# Altium PCB YAW.PcbDoc (part 3 of 3)
Units mil, origin at the board's own origin, x right, y up, seen from the top; angles counter-clockwise.
Board outline 2374.09 x 1897.47 mil, 6 copper layers (Top Layer, Layer 1, Layer 2, Layer 3, Layer 4, Bottom Layer), stack 32.112 mil thick; 77 components, 82 nets, 341 pads, 389 vias.
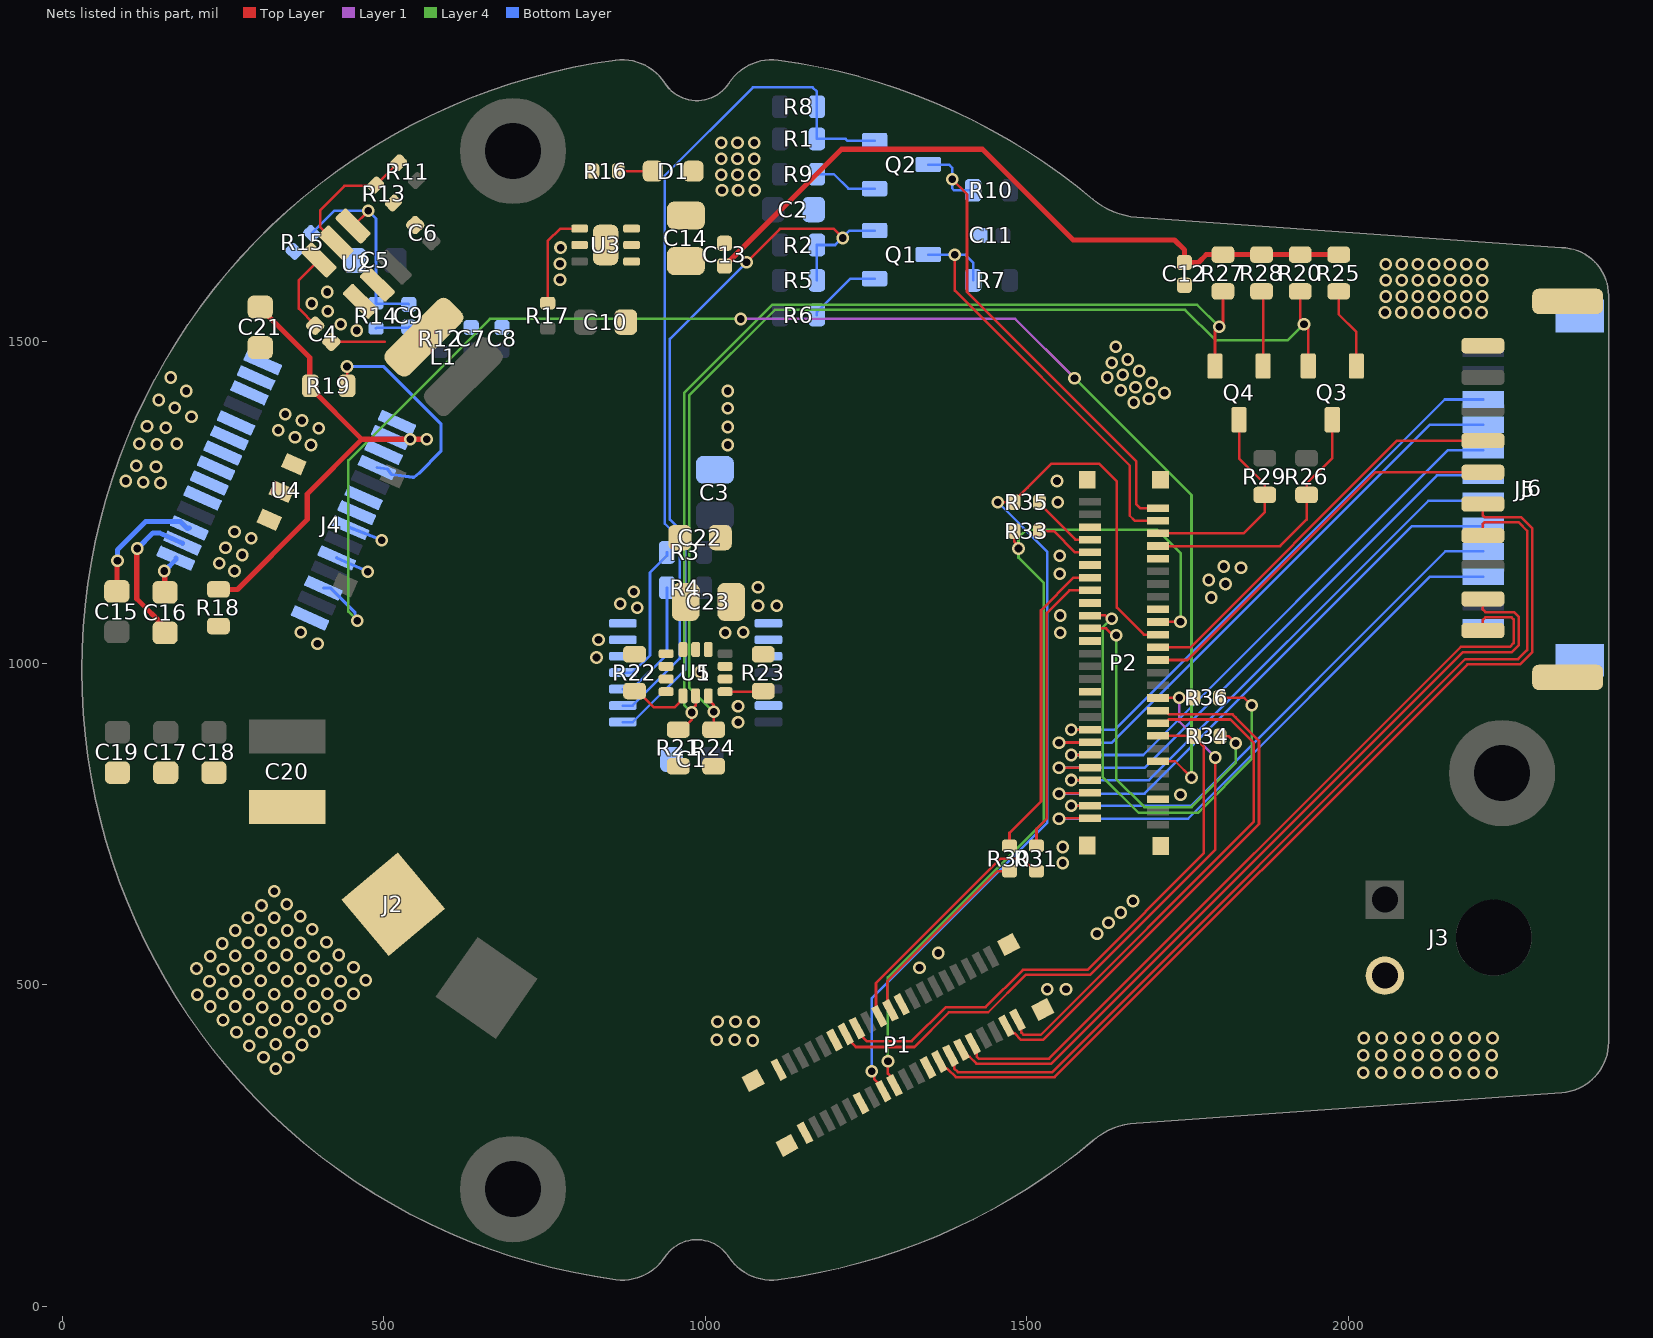
[diagram p6: the nets of this part, all layers, seen from the top]

## Via types
v1: diameter 19.68, hole 11.9, Top Layer to Bottom Layer, tented both sides, 389 vias

## Nets (pads, with @x,y where several pads share a name; then routed paths per layer and width w, separated by ;. In a path a pad name is that pad's centre, name@x,y a point inside that pad or via, vN(x,y) a via of type N, cw(c..) or ccw(c..) an arc to the next point about the centre after c; other vN are vias at no path point) (continued)
ETHE2_TX_N: P1.4 P2.19 | length 846.8
  Top Layer w4: P1.4@1468.07,435.85 1468.07,435.67 1479.24,424.5 1480.75,424.5 1491.25,414 1525,414 1861,750 1861,879 1824.54,915.46 1819.85,920.15 1720.77,920.15 1714.93,925.99 P2.19@1703.91,925.99
ETHE2_TX_P: P1.2 P2.17 | length 811.5
  Top Layer w4: P1.2@1485.45,445.09 1491.37,439.17 1491.37,425.19 1494.56,422 1521.69,422 1853,753.31 1853,875.69 1816.54,912.15 1720.77,912.15 1714.93,906.3 P2.17@1703.91,906.3
ETHE2C_TX_N: J5.2 P1.12 | length 1266.2
  Top Layer w4: P1.12@1398.55,398.88 1398.55,398.7 1409.71,387.54 1411.22,387.54 1421.76,377 1538,377 2178,1017 2254.31,1017 2265,1027.69 2265,1039 2265,1071.31 2257.2,1079.12 2213,1079.12 2209.06,1083.06 J5.2@2209.06,1099.72
ETHE2C_TX_P: J5.1 P1.10 | length 1231
  Top Layer w4: P1.10@1415.93,408.13 1421.85,402.21 1421.85,388.22 1425.07,385 1534.69,385 2174.69,1025 2251,1025 2257,1031 2257,1068 2253.88,1071.12 2213,1071.12 2209.06,1067.17 J5.1@2209.06,1050.51
ETHE2D_RX_N: J5.5 P1.16 | length 1501.8
  Top Layer w4: P1.16@1363.79,380.4 1363.79,380.22 1374.95,369.05 1376.46,369.05 1389.51,356 1543,356 2185,998 2267,998 2286,1017 2286,1209.02 2268.27,1226.76 2211.4,1226.76 2209.06,1229.1 J5.5@2209.06,1247.36
ETHE2D_RX_P: J5.4 P1.14 | length 1466.5
  Top Layer w4: P1.14@1381.17,389.64 1387.09,383.72 1387.09,369.74 1392.83,364 1539.69,364 2181.69,1006 2263.69,1006 2278,1020.31 2278,1205.71 2264.95,1218.76 2211.4,1218.76 2209.06,1216.41 J5.4@2209.06,1198.15
GND: C1.2 C2.2 C3.2 C5.2 C6.2 C7.2 C8.2 C10.2 C11.2 C12.2 C13.2 C14.2 C17.2 C18.2 C19.2 C20.2 C21.2 C22.2 C23.2 D1.1 J2.1 J3.2 J5.10 J5.S1 J5.S2 J6.1 J6.13 J6.14 P1.0 P1.17 P1.18 P1.29 P1.30 P1.39 P1.40 P2.0 P2.5 P2.22 P2.30 P2.35 P2.36 P2.42 P2.43 P2.48 R13.2 R15.2 R23.2 U1.5 U1.6 U1.7 U1.8 U1.9 U1.10 U1.13 U2.1 U3.3 U3.5 U3.7 U4.6 U4.7 U4.10 U4.12 U4.13 U4.14 U4.20 U4.21 U4.28 U4.29 U5.2 U5.3 U5.6 U5.7 U5.9 U5.10 U5.11
  other v1: 2023,363 2051,363 2080,363 2108,363 2137,363 2166,363 2195,363 2223,363 332,369 313,387 352,387 2023,390 2051,390 2080,390 2108,390 2137,390 2166,390 2195,390 2223,390 291,405 373,406 332,407 1074,413 1018,414 1046,414 2024,417 2052,417 2081,417 2109,417 2138,417 2167,417 2196,417 2224,417 271,426 310,426 353,426 392,427 1019,442 1047,442 1075,442 250,445 331,445 290,446 372,446 412,447 311,465 230,466 269,466 350,466 392,466 432,467 210,484 290,485 330,485 249,486 370,486 412,486 453,486 1532,493 1561,493 229,505 270,505 350,505 433,505 309,506 390,506 472,507 250,524 209,525 289,525 370,525 411,525 329,526 1333,526 453,527 230,544 391,544 269,545 309,545 349,546 430,546 1362,549 249,564 289,565 329,565 370,565 411,566 1609,579 269,584 350,584 309,585 389,586 1627,596 289,604 330,604 370,606 1646,612 310,623 349,625 1665,630 330,645 1556,689 1556,714 1739,795 1051,908 1051,933 992,986 830.74,1008.66 834,1036 1031,1047 1552,1047 1059,1048 1552,1074 894,1086 1082,1089 1111,1089 868,1092 1787,1102 889,1111 1082,1118 1809,1123 1783,1129 1551,1139 268,1143 1833,1148 1806,1150 244,1155 1551,1167 280,1168 254,1179 294,1194 268,1204 1548,1250 1547,1283 387,1339 1035,1339 362,1351 336,1362 399,1365 1035,1367 373,1377 347,1387 1035,1396 1666,1405 1690,1411 1714,1420 1035,1423 1646,1424 1669,1429 1694,1436 1625,1444 1649,1448 1675,1454 1632,1467 1657,1472 1638,1492 458,1517 433,1527 2057,1545 2082,1545 2107,1545 2132,1545 2157,1545 2182,1545 2207,1545 413,1547 388,1559 2058,1570 2083,1570 2108,1570 2133,1570 2158,1570 2183,1570 2208,1570 412,1577 2058,1595 2083,1595 2108,1595 2133,1595 2158,1595 2183,1595 2208,1595 774,1596 2058,1620 2083,1620 2108,1620 2133,1620 2158,1620 2183,1620 2208,1620 774,1621 775,1646 1026,1735 1051,1735 1077,1735 1025,1759 1050,1759 1076,1759 1025,1784 1050,1784 1076,1784 1025,1809 1050,1809 1076,1809
MCU1_Main_Left_SWCLK: J6.4 P2.4 | length 833.7
  Top Layer w4: v1(1569,778) 1569.18,778.18 1597.82,778.18 P2.4@1598,778.35
  Bottom Layer w4: v1(1569,778) 1755,778 2150.57,1173.57 J6.4@2209.67,1173.57
MCU1_Main_Left_SWDIO: J6.3 P2.2 | length 863.8
  Top Layer w4: v1(1550,758) 1550.33,758.33 1597.67,758.33 P2.2@1598,758.67
  Bottom Layer w4: v1(1550,758) 1751,758 2127.2,1134.2 J6.3@2209.67,1134.2
MCU1_Main_Right_SWCLK: J6.8 P2.12 | length 866.1
  Top Layer w4: v1(1569,857) v1(1569,857) 1597.95,857.05 P2.12@1598,857.09
  Bottom Layer w4: v1(1569,857) 1681,857 2155.06,1331.06 J6.8@2209.67,1331.06
MCU1_Main_Right_SWDIO: J6.7 P2.10 | length 896.2
  Top Layer w4: v1(1550,837) 1550.2,837.2 1597.8,837.2 P2.10@1598,837.41
  Bottom Layer w4: v1(1550,837) 1683,837 2137.68,1291.68 J6.7@2209.67,1291.68
MCU2_Main_Left_SWCLK: J6.6 P2.8 | length 849.7
  Top Layer w4: v1(1569,818) 1569.14,817.86 1597.86,817.86 P2.8@1598,817.72
  Bottom Layer w4: v1(1569,818) 1690,818 2124.31,1252.31 J6.6@2209.67,1252.31
MCU2_Main_Left_SWDIO: J6.5 P2.6 | length 880.4
  Top Layer w4: v1(1550,797) 1550.52,797.52 1597.48,797.52 P2.6@1598,798.04
  Bottom Layer w4: v1(1550,797) 1683,797 2098.94,1212.94 J6.5@2209.67,1212.94
MCU2_Main_Right_SWCLK: J6.10 P2.16 | length 882.7
  Top Layer w4: v1(1569,896) 1569.23,896.23 1597.77,896.23 P2.16@1598,896.46
  Bottom Layer w4: v1(1569,896) 1636,896 2149.8,1409.8 J6.10@2209.67,1409.8
MCU2_Main_Right_SWDIO: J6.9 P2.14 | length 912.8
  Top Layer w4: v1(1550,876) 1550.39,876.39 1597.61,876.39 P2.14@1598,876.78
  Bottom Layer w4: v1(1550,876) 1632,876 2126.43,1370.43 J6.9@2209.67,1370.43
NetC4_1: C4.1 U2.6 | length 125.7
  Top Layer w4: C4.1@393.47,1524.53 393.47,1525.46 368,1550.93 368,1595.31 U2.6@399.4,1626.71
NetC4_2: C4.2 L1.1 U2.2 | length 82.9
  Top Layer w4: C4.2@418.53,1499.47 501.47,1499.47
NetC9_1: C9.1 R14.2 R15.1 U2.4 | length 336
  Top Layer w4: U2.4@452.29,1679.6 452.6,1679.6 v1(476,1703)
  Bottom Layer w4: R15.1@388,1668 423,1703 v1(476,1703) 488,1691 R14.2@488,1559.68 488.98,1558.7 538.02,1558.7 C9.1@539,1557.72
NetC9_2: C9.2 R12.2 R14.1 | length 101.4
  Bottom Layer w4: R14.1@488,1520.32 488.98,1521.3 538.02,1521.3 C9.2@539,1522.28 539.7,1522.98 587.3,1522.98 R12.2@588,1523.68
NetC15_2: C15.2 U4.3 | length 199.4
  Top Layer w8: C15.2@85,1111.5 85.5,1112 85.5,1158.5 v1(86,1159)
  Bottom Layer w8: v1(86,1159) 86,1176 130,1220 183.71,1220 194.79,1208.92 195.48,1209.13 U4.3@197.55,1209.73
NetC16_1: C16.1 U4.2 | length 233.1
  Top Layer w8: v1(117,1178) 116,1177 116,1100 160,1056 C16.1@160,1047.01
  Bottom Layer w8: v1(117,1178) 141,1202 152.3,1202 163.85,1196.81 U4.2@187.14,1186.35
NetC16_2: C16.2 U4.1 | length 60.7
  Top Layer w8: v1(159,1143) 159.5,1142.5 159.5,1110.5 C16.2@160,1110
  Bottom Layer w8: v1(159,1143) 176.73,1160.73 U4.1@176.73,1162.97
NetC21_1: C21.1 R18.1 R19.2 U4.15 U4.16 U4.17 | length 715.7
  Top Layer w8: R18.1@243,1114.54 272.54,1114.54 381,1223 381,1263 466,1348 ; C21.1@306.5,1553.5 385,1475 385,1429 466,1348 ; v1(567,1348) v1(541,1348) 466,1348
NetD1_2: D1.2 R16.2 | length 53.8
  Top Layer w4: R16.2@864.68,1765 D1.2@918.51,1765
NetJ4_1: J4.1 U4.5
  other v1: 153,1280 126,1281 99,1283 146,1305 115,1307
NetJ4_2: J4.2 U4.8
  other v1: 147,1340 120,1341 178,1341 161,1366 132,1368
NetJ4_3: J4.3 U4.9
  other v1: 201,1383 175,1397 150,1409 193,1423 169,1444
NetJ5_6: J5.6 P2.27 | length 626
  Top Layer w4: P2.27@1703.91,1004.73 1749.73,1004.73 2041.57,1296.57 J5.6@2209.06,1296.57
NetJ5_7: J5.7 P2.29 | length 638.3
  Top Layer w4: P2.29@1703.91,1024.41 1754.41,1024.41 2075.79,1345.79 J5.7@2209.06,1345.79
NetP1_19: P1.19 R30.2 | length 308.1
  Top Layer w4: P1.19@1288,460.05 1282.82,465.22 1282.82,504.82 1454.32,676.32 R30.2@1473,676.32
NetP1_21: P1.21 R31.2 | length 391.7
  Top Layer w4: P1.21@1270.62,450.81 1265.44,455.98 1265.44,502.44 1459,696 1493.35,696 1513.03,676.32 R31.2@1515,676.32
NetP2_11: P2.11 R18.2 U4.22 U4.24 U4.26 | length 2456.7
  Top Layer w4: P2.11@1703.91,847.25 1730.75,847.25 v1(1756,822)
  Layer 1 w4: v1(1055,1535) 1482,1535 v1(1574,1443)
  Layer 4 w4: v1(459,1066) 445,1080 445,1315 665,1535 v1(1055,1535) ; v1(1574,1443) 1756,1261 v1(1756,822)
  Bottom Layer w5: U4.26@406.15,1116.85 417.15,1116.85 455.56,1078.44 455.56,1069.44 v1(459,1066) ; U4.24@426.97,1163.61 v1(475,1142) ; U4.22@447.79,1210.37 v1(497,1191)
  other v1: 397,1030 371,1048
NetP2_32: P2.32 R34.1 | length 560.5
  Top Layer w4: P2.32@1598,1053.94 1623.19,1053.94 1634.13,1043 v1(1639,1043) ; R34.1@1800.37,886 1814,886 v1(1825,875)
  Layer 4 w4: v1(1639,1043) 1639,820 1683,776 1756,776 1825,845 v1(1825,875)
NetP2_34: P2.34 R36.1 | length 715.9
  Top Layer w4: P2.34@1598,1073.63 1598.37,1074 1622.13,1074 1627.13,1069 v1(1632,1069) ; R36.1@1799.68,946 1838,946 v1(1849.5,934.5)
  Layer 4 w4: v1(1632,1069) 1618,1055 1618,823 1674,767 1766,767 1849.5,850.5 v1(1849.5,934.5)
NetP2_44: P2.44 R33.2 | length 92
  Top Layer w4: R33.2@1519.68,1205 1542,1205 1574.93,1172.07 P2.44@1598,1172.07
NetP2_45: P2.45 Q3.3 R26.1 | length 420
  Top Layer w4: P2.45@1703.91,1181.91 1893.91,1181.91 1935,1223 R26.1@1935,1261.46 1935,1279 1975,1319 Q3.3@1975,1378.27
NetP2_46: P2.46 R35.2 | length 103.6
  Top Layer w4: R35.2@1519.68,1250 1519.68,1248.03 1575.72,1192 1597.75,1192 P2.46@1598,1191.75
NetP2_47: P2.47 Q4.3 R29.1 | length 339.8
  Top Layer w4: P2.47@1703.91,1201.6 1836.6,1201.6 1870,1235 R29.1@1870,1261.46 1870,1278 1830,1318 Q4.3@1830,1378.27
NetP2_49: P2.49 Q1.3 R7.1 | length 668.2
  Top Layer w4: v1(1388,1635) 1388,1579 1660,1307 1660,1229 1667.72,1221.28 P2.49@1703.91,1221.28
  Bottom Layer w4: Q1.3@1346.73,1635 1404,1635 1416.46,1622.54 R7.1@1416.46,1595
NetP2_51: P2.51 Q2.3 R10.1 | length 764.9
  Top Layer w4: v1(1384,1752) 1407,1729 1407,1577 1670,1314 1670,1247 1676.03,1240.97 P2.51@1703.91,1240.97
  Bottom Layer w4: Q2.3@1346.73,1775 1379,1775 1384,1770 v1(1384,1752) 1384,1738 1387,1735 R10.1@1416.46,1735
NetQ1_1: Q1.1 R6.1 | length 115.8
  Bottom Layer w4: R6.1@1173.54,1541 1173.54,1545.54 1225.6,1597.6 Q1.1@1263.27,1597.6
NetQ1_2: Q1.2 R2.2 R5.1 U1.1 | length 1154.7
  Top Layer w4: v1(1064,1623) 1116,1675 1200,1675 v1(1214,1661)
  Bottom Layer w4: U1.1@871.78,908.23 887.23,908.23 969,990 969,1199 945,1223 945,1504 v1(1064,1623) ; R5.1@1173.54,1595 R2.2@1173.54,1650 1202,1650 1224.4,1672.4 Q1.2@1263.27,1672.4
NetQ2_1: Q2.1 R9.1 | length 99
  Bottom Layer w4: R9.1@1173.54,1760 1200,1760 1222.4,1737.6 Q2.1@1263.27,1737.6
NetQ2_2: Q2.2 R1.2 R8.1 U1.2 | length 1339.3
  Bottom Layer w4: U1.2@871.78,933.82 886.82,933.82 960,1007 960,1194 937,1217 937,1758 1074,1895 1167,1895 1173.54,1888.46 R8.1@1173.54,1865 R1.2@1173.54,1815 1218,1815 1220.6,1812.4 Q2.2@1263.27,1812.4
NetQ3_1: Q3.1 R25.2 | length 127.5
  Top Layer w4: R25.2@1985,1577.91 1985,1542 2012.4,1514.6 Q3.1@2012.4,1461.73
NetQ4_1: Q4.1 R28.2 | length 117.2
  Top Layer w4: R28.2@1865,1577.91 1867.4,1575.51 Q4.1@1867.4,1461.73
NetR3_2: R3.2 U1.4 | length 224.4
  Bottom Layer w4: U1.4@871.78,985 887,985 914,1012 914,1140.62 940.46,1167.08 R3.2@940.46,1172
NetR4_2: R4.2 U1.3 | length 194.6
  Bottom Layer w4: U1.3@871.78,959.41 886.41,959.41 940.46,1013.46 R4.2@940.46,1117
NetR11_2: R11.2 R13.1 U2.5 | length 213.8
  Top Layer w4: U2.5@425.85,1653.15 401,1678 401,1704 438.85,1741.85 486.43,1741.85 522.5,1777.92 R11.2@523.08,1777.92
NetR17_2: R17.2 U3.4 | length 154.1
  Top Layer w4: R17.2@755,1559.68 755,1656 774.59,1675.59 U3.4@804.65,1675.59
NetR19_1: R19.1 U4.18 | length 376.2
  Top Layer w4: R19.1@443,1431 v1(443,1461)
  Bottom Layer w5: v1(443,1461) 500,1461 589,1372 589,1329 555,1295 546.98,1288.89 544.96,1288.89 534,1290.38 512.16,1293.33 505.82,1301.66 U4.18@489.42,1303.88
NetR22_1: R22.1 U5.12 | length 96
  Top Layer w4: R22.1@890,956.46 894.92,956.46 920.38,931 952,931 965.32,944.32 U5.12@965.32,948.98
NetR23_1: R23.1 U5.1 | length 59.5
  Top Layer w4: U5.1@1030.87,955.47 1089.02,955.47 R23.1@1090,956.46
PWM_1: P1.25 P2.15 R34.2 | length 916.7
  Top Layer w4: P1.25@1235.86,432.32 1235.86,427.14 1251,412 1321,412 1374,465 1436,465 1494,523 1594,523 1775,704 1775,870.03 1761,884.03 R34.2@1761,886 1760.38,886.62 P2.15@1703.91,886.62
PWM_2: P1.26 P2.31 R35.1 | length 1568.1
  Top Layer w4: v1(1259,365) 1262.44,361.56 1262.44,353.56 1276.88,339.12 P1.26@1276.88,334.19 ; v1(1455,1250) R35.1@1480.32,1250 1480.31,1251.97 1501,1272.65 1538.35,1310 1612,1310 1640,1282 1640,1086 1681.9,1044.1 P2.31@1703.91,1044.1
  Bottom Layer w4: v1(1259,365) 1259,479 1532,752 1532,1173 v1(1455,1250)
RX_AI: P2.40 R30.1 | length 483.6
  Top Layer w4: R30.1@1473,715.68 1473,736 1522,785 1522,1082 1572.68,1132.68 P2.40@1598,1132.68
SBUS_1: P1.27 P2.21 R36.2 | length 1028.4
  Top Layer w4: P1.27@1218.47,423.08 1218.47,418.53 1234,403 1325,403 1379,457 1440,457 1498,515 1598,515 1793,710 v1(1793,853) ; P2.21@1703.91,945.67 1704.07,945.84 1736.84,945.84 v1(1737,946) R36.2@1760.32,946
  Layer 1 w4: v1(1737,946) 1737,909 v1(1793,853)
SBUS_2: P1.24 P2.33 R33.1 | length 1416
  Top Layer w4: v1(1284,381) 1284,361.5 1294.27,351.23 P1.24@1294.27,343.43 ; R33.1@1480.32,1205 1480.32,1188.66 1487,1181.97 v1(1487,1178) ; P2.33@1703.91,1063.78 1704.01,1063.89 1738.89,1063.89 v1(1739,1064)
  Layer 4 w4: v1(1284,381) 1284,511 1526,753 1526,1125 1487,1164 v1(1487,1178) 1487,1195 1499,1207 1703,1207 1739,1171 v1(1739,1064)
SCL_IMU1: Q4.2 R21.1 R27.1 U5.13 | length 1593
  Top Layer w4: R21.1@958,896.54 963.54,896.54 979,912 v1(979,923) 979,927.66 985,933.66 U5.13@985,948.98 ; Q4.2@1792.6,1461.73 1792.6,1516.6 1805,1529 R27.1@1805,1577.91
  Layer 4 w4: v1(979,923) 967,935 967,1420 1104,1557 1765,1557 v1(1799,1523)
SDA_IMU1: Q3.2 R20.1 R24.1 U5.14 | length 1725.9
  Top Layer w4: U5.14@1004.68,948.98 1004.68,943.47 1012,936.15 1012,936 1013,935 v1(1013,924) R24.1@1013,896.54 ; R20.1@1925,1577.91 1925,1533 1937.6,1520.4 Q3.2@1937.6,1461.73
  Layer 4 w4: v1(1013,924) 975,962 975,1416 1108,1549 1746,1549 1793,1502 1906,1502 v1(1931,1527)
TX_AI: P2.38 R31.1 | length 450.4
  Top Layer w4: R31.1@1515,715.68 1515,742 1531,758 1531,1078 1566,1113 P2.38@1598,1113
VDD: C12.1 C13.1 C14.1 C22.1 C23.1 R16.1 R20.2 R21.2 R22.2 R24.2 R25.1 R27.2 R28.1 U3.1 U3.2 U5.5 U5.8 | length 1119.9
  Top Layer w8: C13.1@1030,1617.28 1211.72,1799 1431,1799 1572,1658 1729.46,1658 1745,1642.46 C12.1@1745,1622.72 1766.72,1622.72 1779,1635 R27.2@1805,1635 R28.1@1865,1635 R20.2@1925,1635 R25.1@1985,1635
pads on no net: J3. J4.4 J4.5 J5.3 J5.8 J5.9 P1.20 P1.22 P1.23 P1.28 P1.31 P1.32 P1.33 P1.34 P1.36 P1.38 P2.13 P2.41 P2.50 P2.52 U1.14 U4.19 U5.4
copper on no net: | length 6408.8
  Top Layer w5: 785,1795 ccw(c700,1795) 785,1795 ; 785.9,182.2 ccw(c700.9,182.2) 785.9,182.2 ; 2325,830 ccw(c2240,830) 2325,830
  Layer 1 w5: 786,181 ccw(c701,181) 786,181 ; 786,1796 ccw(c701,1796) 786,1796 ; 2324,830 ccw(c2239,830) 2324,830
  Layer 4 w5: 785,1796 ccw(c700,1796) 785,1796 ; 786,182 ccw(c701,182) 786,182 ; 2324,830 ccw(c2239,830) 2324,830
  Bottom Layer w5: 786,182 ccw(c701,182) 786,182 ; 786,1797 ccw(c701,1797) 786,1797 ; 2325,829 ccw(c2240,829) 2325,829

## Polygon pours and split planes (outlines as drawn)
GND on Top Layer "NONET_L-01_P-001" (solid, remove dead copper, pour order 35): 862.4,42.26 ccw(c872.73,120.08) 938.6,77.37 cw(c988.39,45.08) 1038.18,77.38 ccw(c1104.01,119.98) 1114.37,42.26 ccw(c988.54,989.95) 1603.93,258.34 cw(c1680.31,167.22) 1671.64,285.81 2333.17,333.21 ccw(c2327.58,411.47) 2406.04,411.46 2406.04,1571.06 ccw(c2331.73,1572.57) 2406.05,1572.57 ccw(c2331.68,1572.57) 2333.2,1646.93 1672.36,1694.29 cw(c1680.89,1812.51) 1604.56,1721.83 ccw(c988.08,989.71) 1114.82,1938.39 ccw(c1104.53,1860.39) 1038.34,1902.92 cw(c988.37,1934.86) 938.4,1902.92 ccw(c872.27,1860.5) 861.97,1938.39 ccw(c988.39,990.35)
+5V on Top Layer "NONET_L-01_P-001" (solid, remove dead copper, pour order 24): 549,1428 549,1411 601,1359 612,1359 739,1486 813,1486 844,1517 844,1592 818,1618 818,1631 791,1631 791,1550 780,1539 661,1539
NetP2_11 on Top Layer "NONET_L-01_P-001" (solid, pour order 41): 217.94,1073.05 334.05,1073.05 419,1073.05 419,1013 217.94,1013
+5V on Top Layer "NONET_L-01_P-001" (solid, remove dead copper, pour order 33): 1136,958 1128,966 1128,1003 1135,1010 1150,1010 1156,1004 1156,966 1148,958
+5V on Top Layer "NONET_L-01_P-001" (solid, remove dead copper, pour order 31): 1077,884 1069,876 1046,876 1041,871 1041,853 1046,848 1084,848 1093,857 1093,874 1083,884
VDD on Top Layer "NONET_L-01_P-001" (solid, remove dead copper, pour order 30): 811,1790 800,1779 800,1735 814.22,1720.78 888.22,1720.78 911,1698 911,1663 907,1659 875,1659 871,1655 871,1617 873,1615 900,1615 922,1593 922,1194 788,1060 788,926 909,805 1038,805 1038,850 1025,863 920,863 867,916 867,969 878,980 904,980 936,1012 1009,1012 1014,1017 1014,1055 998,1071 998,1542 1048,1592 1048,1632 1045,1635 1017,1635 993,1659 942,1659 934,1667 934,1712 898,1748 851,1748 844,1755 844,1784 838,1790
+5V on Top Layer "NONET_L-01_P-001" (solid, remove dead copper, pour order 28): 1517,1590 1525,1598 1566,1598 1581,1583 1581,1579 1567,1565 1525,1565 1517,1573
12V on Top Layer "NONET_L-01_P-001" (solid, remove dead copper, pour order 20): 2167,759 2167,615 2121,569 2020,569 1971,520 1971,301 1927.29,257.29 1622.29,257.29 1370,5 561,5 303,279 665,641 752,554 821.11,554 1074.55,300.55 1122.44,208.43 1398.9,356 1529,356 1962,789 2137,789
NetC4_2 on Top Layer "NONET_L-01_P-001" (solid, remove dead copper, pour order 19): 487.47,1499.47 497.47,1509.47 501.47,1509.47 501.47,1489.47 497.47,1489.47
NetC21_1 on Top Layer "NONET_L-01_P-001" (solid, remove dead copper, pour order 18): 521,1348 539,1366 579,1366 579,1330 538,1330
NetJ4_3 on Top Layer "NONET_L-01_P-001" (solid, remove dead copper, pour order 15): 367.74,1279.9 212,1360 117.88,1409.08 149.88,1482.08 215,1440 252,1400 309,1355 384,1320
NetJ4_1 on Top Layer "NONET_L-01_P-001" (solid, remove dead copper, pour order 14): 332,1201 225.47,1247.17 196.68,1253.21 64.69,1268.74 81,1324 171,1316 270.52,1268 292.15,1255.31 347.06,1232.19
NetJ4_2 on Top Layer "NONET_L-01_P-001" (solid, remove dead copper, pour order 13): 349.6,1238.22 302.92,1255.85 179,1320 86,1330 118,1403 218.79,1350.64 253.19,1330 299.12,1307.08 365.09,1275.64
12V on Top Layer "NONET_L-01_P-001" (solid, remove dead copper, pour order 8): 484,1628 524,1588 615,1588 638,1611 638,1626 577.5,1686.5 543,1652 502,1652 484,1634
12V on Top Layer "NONET_L-01_P-001" (solid, remove dead copper, pour order 6): 23,1070 129,1070 129,1025.13 151.13,1003 424,1003 424,864 406,846 296,846 278,864 23,864
NetC4_2 on Top Layer "NONET_L-01_P-001" (solid, remove dead copper, pour order 4): 456,1601 497,1560 497,1467 524,1440 540,1440 630,1530 630,1548 598,1580 521,1580 478,1623
GND on Bottom Layer "NONET_L-01_P-001" (solid, remove dead copper, pour order 34): 861.01,41.83 ccw(c871.34,119.65) 937.21,76.95 cw(c987,44.65) 1036.79,76.95 ccw(c1102.62,119.55) 1112.99,41.83 ccw(c987.16,989.52) 1602.54,257.92 cw(c1678.93,166.79) 1670.25,285.38 2331.78,332.78 ccw(c2326.19,411.04) 2404.65,411.04 2404.65,1570.64 ccw(c2330.35,1572.14) 2404.67,1572.14 ccw(c2330.29,1572.14) 2331.81,1646.5 1670.97,1693.87 cw(c1679.5,1812.08) 1603.17,1721.41 ccw(c986.69,989.28) 1113.43,1937.96 ccw(c1103.14,1859.96) 1036.95,1902.49 cw(c986.98,1934.43) 937.02,1902.49 ccw(c870.88,1860.07) 860.58,1937.96 ccw(c987,989.93)
+5V on Bottom Layer "NONET_L-01_P-001" (solid, pour order 45): 700,1502 570,1502 567,1499 567,1431 601,1397 619,1397 704,1482 704,1498
+5V on Bottom Layer "NONET_L-01_P-001" (solid, remove dead copper, pour order 39): 567,1499 713,1499 790,1576 790,1606 796,1612 826,1612 847,1591 847,1561 757,1471 567,1471
+5V on Bottom Layer "NONET_L-01_P-001" (solid, remove dead copper, pour order 32): 991,886 991,832 994,829 1042.6,829 1094,855.26 1094,875 1046,887 992,887
+5V on Bottom Layer "NONET_L-01_P-001" (solid, remove dead copper, pour order 27): 1514.5,1592.5 1520,1598 1566.5,1598 1573.5,1591 1573.5,1571 1567.5,1565 1525.5,1565 1514.5,1576
12V on Bottom Layer "NONET_L-01_P-001" (solid, remove dead copper, pour order 21): 241.83,1229.66 232,1210 203,1222 177.42,1233.88 128.08,1230.08 87.3,1189.3 51,1189.3 51,1237 64.91,1265.35 182.86,1256.81
12V on Bottom Layer "NONET_L-01_P-001" (solid, pour order 22): 306,1374.5 249,1399.5 156,1488.5 174,1524 199,1551.5 260,1467 257,1420 314.33,1394.28
NetC21_1 on Bottom Layer "NONET_L-01_P-001" (solid, remove dead copper, pour order 17): 469,1330 524,1306 530.63,1306.85 579,1338.92 579,1362.47 497,1398 467.81,1333.37
NetJ4_1 on Bottom Layer "NONET_L-01_P-001" (solid, remove dead copper, pour order 12): 195,1277 155,1319 87.5,1323 68,1290 68,1270 187,1260 241,1236 249,1253
NetJ4_3 on Bottom Layer "NONET_L-01_P-001" (solid, remove dead copper, pour order 11): 291.5,1346.88 283.49,1328.86 224,1355 123,1408 134,1451 158,1482 224,1414.38 237,1371
NetJ4_2 on Bottom Layer "NONET_L-01_P-001" (solid, remove dead copper, pour order 10): 227,1347 117,1403 97,1369 89,1330 181,1323 219,1330 273,1306 281,1323
12V on Bottom Layer "NONET_L-01_P-001" (solid, remove dead copper, pour order 9): 508,1652 543,1652 567,1676 588,1676 638,1626 638,1611 613,1586 526,1586 498,1614 498,1642
+5V on Bottom Layer "NONET_L-01_P-001" (solid, remove dead copper, pour order 3): 1074,995 1120,995 1135,1010 1150,1010 1156,1004 1156,964 1151,959 1135,959 1119,975 1074,975
GND on Layer 1 "NONET_L-01_P-001" (solid, remove dead copper, pour order 36): 862.4,41.26 ccw(c872.73,119.08) 938.6,76.37 cw(c988.39,44.08) 1038.18,76.38 ccw(c1104.01,118.98) 1114.37,41.26 ccw(c988.54,988.95) 1603.93,257.34 cw(c1680.31,166.22) 1671.64,284.81 2333.17,332.21 ccw(c2327.58,410.47) 2406.04,410.46 2406.04,1570.06 ccw(c2331.73,1571.57) 2406.05,1571.57 ccw(c2331.68,1571.57) 2333.2,1645.93 1672.36,1693.29 cw(c1680.89,1811.51) 1604.56,1720.83 ccw(c988.08,988.71) 1114.82,1937.39 ccw(c1104.53,1859.39) 1038.34,1901.92 cw(c988.37,1933.86) 938.4,1901.92 ccw(c872.27,1859.5) 861.97,1937.39 ccw(c988.39,989.35)
NetP2_11 on Layer 1 "NONET_L-01_P-001" (solid, pour order 16): 346,1115 434,1203 491,1203 505,1197 477.97,1157.27 466,1134 464,1078 405.77,1013 390,1013 346,1057
12V on Layer 1 "NONET_L-01_P-001" (solid, remove dead copper, pour order 5): 903,502 707.2,41.2 478.8,41.2 19,501 19,1500 344,1825 439,1825 654,1610 654,1599 339,1284 339,1055 732,662
+5V on Layer 1 "NONET_L-01_P-001" (solid, remove dead copper, pour order 25): 791,1606 791,1557 831,1557 853,1579 853,1583 830,1606
+5V on Layer 1 "NONET_L-01_P-001" (solid, remove dead copper, pour order 23): 1113,988 1135,1010 1150,1010 1156,1004 1156,964 1151,959 1135,959 1113,981
+5V on Layer 1 "NONET_L-01_P-001" (solid, remove dead copper, pour order 26): 1514,1587 1527,1600 1564,1600 1573,1591 1573,1571 1565,1563 1527,1563 1514,1576
12V on Layer 1 "NONET_L-01_P-001" (solid, remove dead copper, pour order 0): 2167,759 2167,615 2121,569 2020,569 1971,520 1971,301 1927.29,257.29 1622.29,257.29 1370,5 561,5 303,279 665,641 752,554 821.11,554 1036.76,338.34 1104,209 1379.38,356 1529,356 1962,789 2137,789
GND on Layer 4 "NONET_L-01_P-001" (solid, remove dead copper, pour order 37): 860.98,41.5 ccw(c871.3,119.32) 937.17,76.61 cw(c986.96,44.32) 1036.75,76.62 ccw(c1102.58,119.22) 1112.95,41.5 ccw(c987.12,989.18) 1602.5,257.58 cw(c1678.89,166.46) 1670.21,285.04 2331.74,332.44 ccw(c2326.15,410.71) 2404.61,410.7 2404.61,1570.3 ccw(c2330.31,1571.81) 2404.63,1571.81 ccw(c2330.25,1571.81) 2331.77,1646.17 1670.93,1693.53 cw(c1679.46,1811.75) 1603.13,1721.07 ccw(c986.65,988.95) 1113.39,1937.63 ccw(c1103.1,1859.63) 1036.91,1902.16 cw(c986.94,1934.09) 936.98,1902.16 ccw(c870.84,1859.74) 860.54,1937.63 ccw(c986.96,989.59)
GND on Layer 3 "NONET_L-01_P-001" (solid, pour order 43): 860.95,41.2 ccw(c871.28,119.02) 937.15,76.32 cw(c986.94,44.02) 1036.73,76.32 ccw(c1102.56,118.92) 1112.92,41.2 ccw(c987.1,988.89) 1602.48,257.29 cw(c1678.86,166.16) 1670.19,284.75 2331.72,332.15 ccw(c2326.13,410.41) 2404.59,410.41 2404.59,1570.01 ccw(c2330.29,1571.51) 2404.61,1571.51 ccw(c2330.23,1571.51) 2331.75,1645.87 1670.91,1693.24 cw(c1679.44,1811.45) 1603.11,1720.78 ccw(c986.63,988.65) 1113.37,1937.33 ccw(c1103.08,1859.33) 1036.89,1901.86 cw(c986.92,1933.8) 936.96,1901.86 ccw(c870.82,1859.44) 860.52,1937.33 ccw(c986.94,989.3)
GND on Layer 2 "NONET_L-01_P-001" (solid, pour order 44): 860.95,41.2 ccw(c871.28,119.02) 937.15,76.32 cw(c986.94,44.02) 1036.73,76.32 ccw(c1102.56,118.92) 1112.92,41.2 ccw(c987.1,988.89) 1602.48,257.29 cw(c1678.86,166.16) 1670.19,284.75 2331.72,332.15 ccw(c2326.13,410.41) 2404.59,410.41 2404.59,1570.01 ccw(c2330.29,1571.51) 2404.61,1571.51 ccw(c2330.23,1571.51) 2331.75,1645.87 1670.91,1693.24 cw(c1679.44,1811.45) 1603.11,1720.78 ccw(c986.63,988.65) 1113.37,1937.33 ccw(c1103.08,1859.33) 1036.89,1901.86 cw(c986.92,1933.8) 936.96,1901.86 ccw(c870.82,1859.44) 860.52,1937.33 ccw(c986.94,989.3)

## Keep-outs
Keep-Out Layer:
  lines w6: 1053.92,1286.43 1053.92,1177.66 ccw(c1093.29,1177.66) 1073.95,1143.36 cw(c986.94,989.04) 900.01,1143.41 ccw(c880.69,1177.71) 912.12,1154 ccw(c880.73,1177.76) 920.1,1177.76 920.1,1449.38 ccw(c880.73,1449.38) 876.88,1488.57 876.81,1488.86 ccw(c986.94,989.04) 488.28,1104.29 ccw(c526.63,1095.42) 487.43,1098.99 ccw(c987.09,988.95) 487.41,878.97 ccw(c526.59,882.82) 488.23,873.97 ccw(c986.94,989.04) 1096.97,1488.88 1096.9,1488.55 ccw(c1093.33,1449.34) 1053.96,1449.34 1053.96,1286.43 ; 860.52,1937.39 cw(c870.93,1859.34) 937.24,1901.79 ccw(c986.98,1933.63) 1036.71,1901.79 cw(c1103.03,1859.34) 1113.43,1937.39 cw(c986.98,989.09) 1603.34,1720.77 ccw(c1679.43,1811.1) 1670.99,1693.3 2331.8,1645.93 cw(c2326.17,1567.39) 2404.91,1567.39 2404.91,410.23 cw(c2326.17,410.23) 2331.8,331.7 1670.28,284.28 ccw(c1678.72,166.47) 1602.7,256.87 cw(c986.98,989.09) 1113,40.73 cw(c1102.63,118.78) 1036.54,75.98 ccw(c986.98,43.87) 937.41,75.98 cw(c871.33,118.78) 860.95,40.73 cw(c986.98,989.09) 860.52,1937.39

## Silkscreen, mask and mechanical layers (free items; w line width, h text height)
Top Overlay:
  circle w5: c2238.87,829.13 r85
  circle w5: c700.5,1796.08 r85
  circle w5: c701,182.2 r85
  lines w10: 259.54,1164.37 455.33,1077.2 558.09,1308.01 362.3,1395.18 259.54,1164.37 ; 1025.28,350.31 1499.21,602.31 1572.85,463.81 1098.91,211.81 1025.28,350.31 ; 1570,675 1730,675 1730,1325 1570,1325 1570,675 ; 2220,950 2390,950 2390,1580 2220,1580 2220,950
  text "C YAW OMNISIGHT v2.0 / eal-time Robotics" at 1419,1477 h35 r90
  text "R" at 1415,1397 h120 r90
  text "C YAW TO MAIN" at 1878,721 h70 r90
  text "GND" at 368.47,430.6 h70 r45
  text "12V" at 517,312.07 h70 r45
  text "C YAW TO AI" at 1199,184 h70 r28
Mechanical 1:
  drawing of 1938 lines, arcs and shapes, not listed
Mechanical 13:
  circle w5: c700.95,1796.37 r85
  lines w0.5: 2590.63,437.38 2590.63,405.89 2602.44,405.89 2656.99,437.38 ; 2590.63,707.07 2590.63,738.56 2602.44,738.56 2656.99,707.07 ; 2763.86,445.26 2407.56,445.26 ; 2763.86,699.19 2407.56,699.19 ; 2407.56,445.26 2407.56,699.19 ; 2407.56,445.26 2407.56,437.38 2763.86,437.38 ; 2407.56,699.19 2407.56,707.07 2763.86,707.07 ; 2763.86,437.38 2787.48,437.38 2787.48,468.88 ; 2763.86,437.38 2763.86,468.88 ; 2763.86,468.88 2787.48,468.88 ; 2763.86,468.88 2763.86,675.57 ; 2763.86,675.57 2763.86,707.07 ; 2763.86,675.57 2787.48,675.57 ; 2763.86,707.07 2787.48,707.07 2787.48,675.57 ; 2787.48,468.88 2787.48,675.57

## Text inside footprints (layer, text, board x,y; h text height)
J3: Mechanical 13 "NPTH D3.00+/-0.05" at 2596.08,438.16 h19.68 r90; Mechanical 13 "PTH D1.02 MIN" at 2560.65,438.16 h19.68 r90